# Altium PCB Juricic_Ivan.PcbDoc
Units mm, origin at the board's own origin, x right, y up, seen from the top; angles counter-clockwise.
Board outline 104.25 x 78.25 mm, 2 copper layers (Top Layer, Bottom Layer); 57 components, 71 nets, 285 pads, 6 vias.
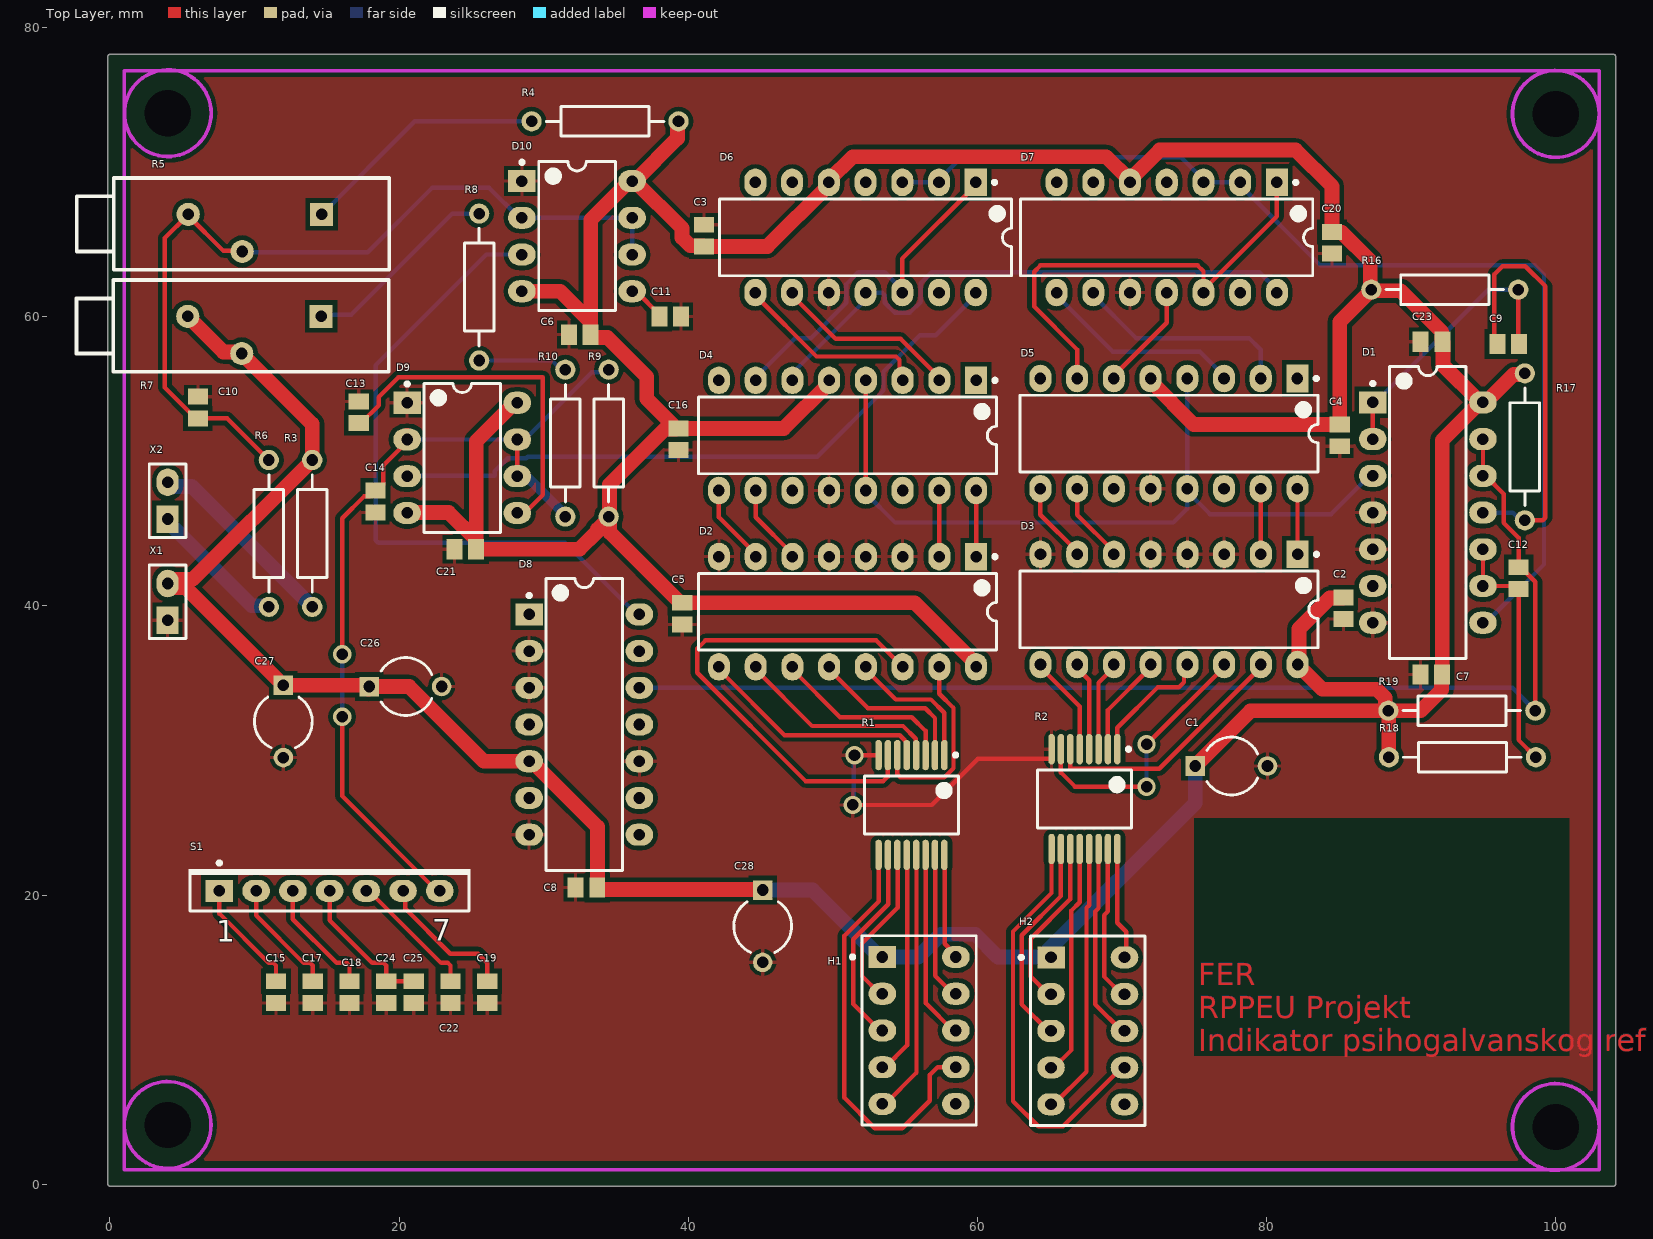
[diagram p0: Top Layer view]
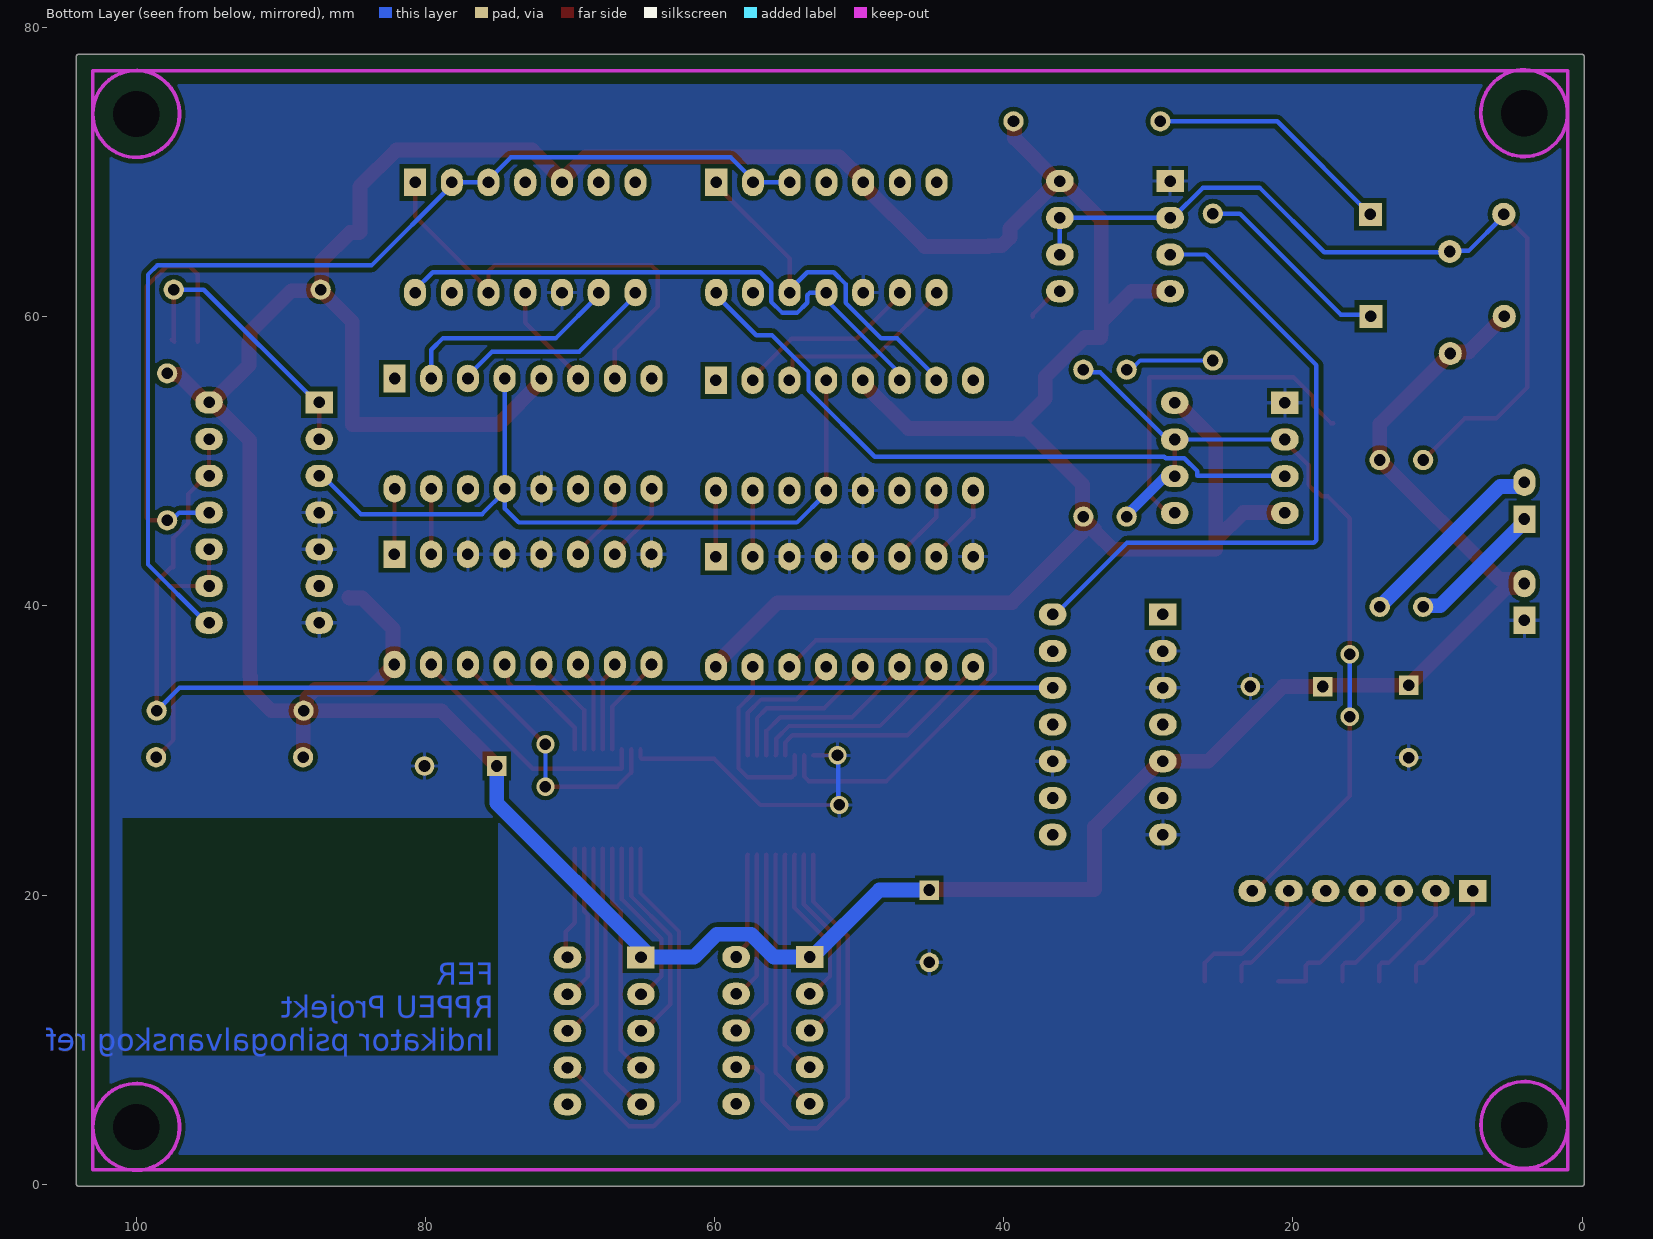
[diagram p1: Bottom Layer view, seen from below]

## Layer stack, top to bottom
Top Solder: solder mask 0.0102, Solder Resist, Dk 3.5
Top Layer: signal copper 0.0356
Dielectric 1: dielectric 0.32, FR-4, Dk 4.8
Bottom Layer: signal copper 0.0356
Bottom Solder: solder mask 0.0102, Solder Resist, Dk 3.5

## Board outline
0,-0.127 cw(c0,0) -0.127,0 -0.127,78 cw(c0,78) 0,78.127 104,78.127 cw(c104,78) 104.127,78 104.127,0 cw(c104,0) 104,-0.127

## Design rules (kind name [scope] priority, off if disabled: settings)
Clearance [All] p1: gap=0.305 ignorepadtopadclearanceinfootprint=TRUE except(0.127: Arc-SMDPad Track-SMDPad)
HoleSize [All] p1: absolutevalues=TRUE maxlimit=3.2 minlimit=0.025 maxpercent=80.000 minpercent=20.000
MinimumSolderMaskSliver [All] p1: minsoldermaskwidth=0.051
PolygonConnect [All] p1: connectstyle=Relief reliefconductorwidth=0.254 reliefentries=4 polygonreliefangle="90 Angle" airgapwidth=0.254
RoutingVias [All] p1: holewidth=0.711 width=1.27 viastyle="Through Hole" minholewidth=0.711 minwidth=1.27 maxholewidth=0.711 maxwidth=1.27
SilkToSolderMaskClearance [IsPad] p1: minsilkscreentomaskgap=0.051 clearancetoexposedcopper=TRUE
SolderMaskExpansion [All] p1: expansion=0.102 istentingtop=FALSE
Width [All] p1: maxlimit=1.524 minlimit=0.305 preferedwidth=0.305
27 further rules are at their usual default settings.

## Classes and differential pairs
component class Juricic_Ulaz: C9 C10 C11 C12 C13 C14 C15 C17 C18 C19 C22 C24 C25 D1 D8 D9 D10 R3 R4 R5 R6 R7 R8 R9 R10 R16 R17 R18 R19 S1 X2
component class Juricic_Napajanje: C1 C2 C3 C4 C5 C6 C7 C8 C16 C20 C21 C23 C26 C27 C28 X1
component class Juricic_Izlaz: D2 D3 D4 D5 D6 D7 H1 H2 R1 R2

## Components (designator, comment, footprint, x,y, rotation, side; value= is the part's Value field where it differs from the comment)
C1 "100u" CAPR5-4X5 77.558,28.921 r0 top
C2 "100n" C0805 85.305,39.831 r90 top
C3 "100n" C0805 41.086,65.597 r270 top
C4 "100n" C0805 85.051,51.781 r90 top
C5 "100n" C0805 39.585,39.462 r90 top
C6 "100n" C0805 32.5,58.75 r0 top
C7 "100n" C0805 91.378,35.244 r0 top
C8 "100n" C0805 32.958,20.512 r0 top
C9 "100n" C0805 96.7,58.104 r0 top
C10 "1u" C0805 6.096,53.709 r270 top
C11 "10n" C0805 38.75,60 r0 top
C12 "100n" C0805 97.423,41.912 r90 top
C13 "1u" C0805 17.221,53.383 r90 top value=100pF
C14 "1u" C0805 18.376,47.209 r90 top value=100pF
C15 "6n8" C0805 11.495,13.285 r90 top
C16 "100n" C0805 39.331,51.515 r90 top
C17 "15n" C0805 14.035,13.285 r90 top
C18 "27n" C0805 16.575,13.285 r90 top
C19 "56n" C0805 26.1,13.285 r90 top
C20 "100n" C0805 84.52,65.101 r90 top
C21 "100n" C0805 24.587,43.907 r0 top
C22 "100n" C0805 23.56,13.285 r90 top
C23 "100n" C0805 91.401,58.258 r0 top
C24 "1u" C0805 19.115,13.285 r90 top
C25 "1u" C0805 21.02,13.285 r90 top
C26 "10u" CAPR5-4X5 20.447,34.417 r0 top
C27 "10u" CAPR5-4X5 12,32 r270 top
C28 "10u" CAPR5-4X5 45.15,17.845 r270 top
D1 "7400" DIP-14 91.147,46.447 r0 top
D2 "74247" DIP-16 51.015,39.589 r270 top
D3 "74247" DIP-16 73.25,39.75 r270 top
D4 "7475" DIP-16 51.015,51.781 r270 top
D5 "7475" DIP-16 73.24,51.908 r270 top
D6 "7490" DIP-14 52.262,65.47 r270 top
D7 "7490" DIP-14 73.09,65.47 r270 top
D8 "7490" DIP-14 32.81,31.79 r0 top
D9 "555" DIP-8 24.373,50.23 r0 top
D10 "555" DIP-8 32.31,65.56 r0 top
H1 "Dpy Amber-CA" A 55.968,10.633 r0 top
H2 "Dpy Amber-CA" A 67.629,10.606 r0 top
R1 "330" SSOP16_N 55.437,26.227 r270 top
R2 "330" SSOP16_N 67.398,26.635 r270 top
R3 "22k" AXIAL-0.4 14,45 r90 top
R4 "330k" AXIAL-0.4 34.25,73.5 r0 top
R5 "1M" Trimmer 10.033,67.056 r180 top
R6 "22k" AXIAL-0.4 11,45 r90 top
R7 "1M" Trimmer 10,60 r180 top
R8 "6k8" AXIAL-0.4 25.541,62.041 r270 top
R9 "470" AXIAL-0.4 34.5,51.25 r270 top value=1K
R10 "390" AXIAL-0.4 31.5,51.25 r270 top
R16 "10k" AXIAL-0.4 92.318,61.863 r180 top
R17 "10k" AXIAL-0.4 97.855,50.992 r90 top
R18 "10k" AXIAL-0.4 93.537,29.529 r180 top
R19 "10k" AXIAL-0.4 93.5,32.75 r180 top value=1K
S1 "SW-6WAY" SW-7 15.201,20.285 r0 top
X1 "Napajanje" HDR1X2 4,39 r90 top
X2 "Ulaz" HDR1X2 4,46 r90 top

## Footprints (in the part's own frame and the unit in brackets; to place one, negate y for a bottom-side part, rotate by r counter-clockwise, add the part's x,y. Pads: shape width x height; smd on the part's side, far side on the other; paste and mask are expansions set on the pad)
A [mm] "LED, 7-Segment Display, 7.62 mm, RHD; 10 Leads; Row Space 5.08 mm; Pitch 2.54 mm"
  rect 1.905x1.524 hole 0.8: 1(-2.54,5.08)
  oval 1.905x1.524 hole 0.8: 2(-2.54,2.54) 3(-2.54,0) 4(-2.54,-2.54) 5(-2.54,-5.08) 6(2.54,-5.08) 7(2.54,-2.54) 8(2.54,0) 9(2.54,2.54) 10(2.54,5.08)
  silkscreen extent -4.72,-6.55 3.95,6.55, body extent -3.95,-6.55 3.95,6.55, height 6.34
AXIAL-0.4 [mm] "Axial Device, Thru-Hole; 2 Leads; 0.4 in Pin Spacing"
  round 1.4 hole 0.8: 1(-5.08,0) 2(5.08,0)
  silkscreen extent -4.06,-1.02 4.06,1.02
C0805 [mm] "Chip Capacitor, Body 2.0x1.3mm, IPC High Density"
  rect 1.1x1.4 smd: 1(-0.75,0) 2(0.75,0)
  body extent -1.1,-0.72 1.1,0.72, height 1.4
CAPR5-4X5 [mm] "Capacitor; 2 Leads"
  rect 1.35x1.35 hole 0.8: 1(-2.5,0)
  round 1.35 hole 0.8: 2(2.5,0)
  silkscreen extent -1.69,-2 1.82,2
DIP-8 [mm] "DIP; 8 Leads; Row Spacing 7.62 mm; Pitch 2.54 mm"
  rect 1.905x1.524 hole 0.8: 1(-3.81,3.81)
  oval 1.905x1.524 hole 0.8: 2(-3.81,1.27) 3(-3.81,-1.27) 4(-3.81,-3.81) 5(3.81,-3.81) 6(3.81,-1.27) 7(3.81,1.27) 8(3.81,3.81)
  silkscreen extent -3.93,-5.15 2.65,5.23, body extent -3.6,-5.15 3.6,5.15, height 5.08
DIP-14 [mm] "DIP; 14 Leads; Row Spacing 7.62 mm; Pitch 2.54 mm"
  rect 1.905x1.524 hole 0.8: 1(-3.81,7.62)
  oval 1.905x1.524 hole 0.8: 2(-3.81,5.08) 3(-3.81,2.54) 4(-3.81,0) 5(-3.81,-2.54) 6(-3.81,-5.08) 7(-3.81,-7.62) 8(3.81,-7.62) 9(3.81,-5.08) 10(3.81,-2.54) 11(3.81,0) 12(3.81,2.54) 13(3.81,5.08) 14(3.81,7.62)
  silkscreen extent -3.93,-10.1 2.65,10.1, body extent -3.6,-10.1 3.6,10.1, height 5.08
DIP-16 [mm] "DIP; 16 Leads; Row Spacing 7.62 mm; Pitch 2.54 mm"
  rect 1.905x1.524 hole 0.8: 1(-3.81,8.89)
  oval 1.905x1.524 hole 0.8: 2(-3.81,6.35) 3(-3.81,3.81) 4(-3.81,1.27) 5(-3.81,-1.27) 6(-3.81,-3.81) 7(-3.81,-6.35) 8(-3.81,-8.89) 9(3.81,-8.89) 10(3.81,-6.35) 11(3.81,-3.81) 12(3.81,-1.27) 13(3.81,1.27) 14(3.81,3.81) 15(3.81,6.35) 16(3.81,8.89)
  silkscreen extent -3.93,-10.3 2.65,10.32, body extent -3.6,-10.28 3.6,10.28, height 5.08
HDR1X2 [mm] "Connector; Header; 2 Position"
  rect 1.905x1.524 hole 0.8: 1(0,0)
  oval 1.905x1.524 hole 0.8: 2(2.54,0)
  silkscreen extent -1.27,-1.27 3.81,1.27
SSOP16_N [mm] "SOP, 16-Leads, Body 6.2x5.3mm, Pitch 0.65mm, IPC Medium Density"
  oval 2.1x0.45 smd: 1(-3.45,2.275) 2(-3.45,1.625) 3(-3.45,0.975) 4(-3.45,0.325) 5(-3.45,-0.325) 6(-3.45,-0.975) 7(-3.45,-1.625) 8(-3.45,-2.275) 9(3.45,-2.275) 10(3.45,-1.625) 11(3.45,-0.975) 12(3.45,-0.325) 13(3.45,0.325) 14(3.45,0.975) 15(3.45,1.625) 16(3.45,2.275)
  silkscreen extent -3.57,-3.25 2,3.25, body extent -2.7,-3.25 2.7,3.25, height 2
SW-7 [mm] "Switch; 7 Leads"
  rect 1.905x1.524 hole 0.8: 1(-7.62,0)
  oval 1.905x1.524 hole 0.8: 2(-5.08,0) 3(-2.54,0) 4(0,0) 5(2.54,0) 6(5.08,0) 7(7.62,0)
  silkscreen extent -9.75,-1.4 9.75,2.05
Trimmer [mm]
  rect 1.6x1.6 hole 0.8: 1(-4.61,-0.015)
  round 1.6 hole 0.8: 2(4.61,-0.015) 3(0.876,2.555)
  silkscreen extent -9.28,-2.52 12.31,3.83

## Part data
C1: library part Elko, "100u capacitor", Cijena=0.299, Dobavljač=Farnell, Kat. broj=1219466
C2 C3 C4 C5 C6 C7 C8 C9 C12 C16 C20 C21 C22 C23: library part Cap, "100n capacitor", LatestRevisionDate=17-Jul-2002, LatestRevisionNote="Re-released for DXP Platform.", PackageDescription="Radial Cap, Thru-Hole; 2 Leads; 0.3 in Pin Spacing", PackageReference=RAD-0.3, Published=8-Jun-2000, Publisher="Altium Limited"
  C2 C3 C4 C5 C6 C7 C8 C16 C20 C21 C23: Cijena=0.0233, Kat. broj=1759122
C10 C13 C14 C24 C25: library part Cap, "1u capacitor", LatestRevisionDate=17-Jul-2002, LatestRevisionNote="Re-released for DXP Platform.", PackageDescription="Radial Cap, Thru-Hole; 2 Leads; 0.3 in Pin Spacing", PackageReference=RAD-0.3, Published=8-Jun-2000, Publisher="Altium Limited"
C11: library part Cap, "10n capacitor", LatestRevisionDate=17-Jul-2002, LatestRevisionNote="Re-released for DXP Platform.", PackageDescription="Radial Cap, Thru-Hole; 2 Leads; 0.3 in Pin Spacing", PackageReference=RAD-0.3, Published=8-Jun-2000, Publisher="Altium Limited"
C15: library part Cap, "6n8 capacitor", LatestRevisionDate=17-Jul-2002, LatestRevisionNote="Re-released for DXP Platform.", PackageDescription="Radial Cap, Thru-Hole; 2 Leads; 0.3 in Pin Spacing", PackageReference=RAD-0.3, Published=8-Jun-2000, Publisher="Altium Limited"
C17: library part Cap, "15n capacitor", LatestRevisionDate=17-Jul-2002, LatestRevisionNote="Re-released for DXP Platform.", PackageDescription="Radial Cap, Thru-Hole; 2 Leads; 0.3 in Pin Spacing", PackageReference=RAD-0.3, Published=8-Jun-2000, Publisher="Altium Limited"
C18: library part Cap, "27n capacitor", LatestRevisionDate=17-Jul-2002, LatestRevisionNote="Re-released for DXP Platform.", PackageDescription="Radial Cap, Thru-Hole; 2 Leads; 0.3 in Pin Spacing", PackageReference=RAD-0.3, Published=8-Jun-2000, Publisher="Altium Limited"
C19: library part Cap, "56n capacitor", LatestRevisionDate=17-Jul-2002, LatestRevisionNote="Re-released for DXP Platform.", PackageDescription="Radial Cap, Thru-Hole; 2 Leads; 0.3 in Pin Spacing", PackageReference=RAD-0.3, Published=8-Jun-2000, Publisher="Altium Limited"
C26 C27 C28: library part Elko, "10u capacitor", Cijena=0.214, Dobavljač=Farnell, Kat. broj=1457413
D1: "NI sklop", Cijena=1.41, Dobavljač=Farnell, Kat. broj=3119930
D2 D3: "Dekoder BCD-a u 7-segmentni sklop", Cijena=1.41, Dobavljač=Farnell, Kat. broj=3119930
D4 D5: "2-bitni CMOS bistabil", Cijena=0.691, Dobavljač=Farnell, Kat. broj=CD74HC75E
D6 D7 D8: "Dekadsko/binarno brojilo", Cijena=1.33, Dobavljač=Farnell, Kat. broj=1470790
H1 H2: "7.62 mm Black Surface Orange 7-Segment Display: CA, RH DP", Colour=Orange, ComponentLink1Description="Manufacturer Link", ComponentLink1URL=http://www.agilent.com/, DatasheetVersion=19-Feb-2002, LatestRevisionDate=17-Dec-2003, LatestRevisionNote="Schematic revised, PCB Footprint replaced.", MinimumIntensity="354 ucd", Note="IF = 5 mA", PackageDescription="LED, 7-Segment Display, 7.62 mm, RHD; 10 Leads; Row Space 5.08 mm; Pitch 2.54 mm", PackageReference=A, PackageVersion=11-Feb-2002, Published=8-Jun-2000, Publisher="Altium Limited"
R1 R2: library part "Res Pack4", "330 ohm, 8 resistor network", Cijena=0.594, Code_IPC=SOP65P780-16, Code_JEDEC=MO-150-AC, Dobavljač=Farnell, Kat. broj=9356665, LatestRevisionDate=29-May-2009, LatestRevisionNote="IPC-7351 Footprint Added.", PackageDescription="16-Pin Plastic Small Outline Package 0.65 mm Pitch", PackageReference=SSOP16, PackageVersion=Oct-2003, Published=24-Mar-1999, Publisher="Altium Limited"
R3 R6: library part Res2, "22k resistor", LatestRevisionDate=17-Jul-2002, LatestRevisionNote="Re-released for DXP Platform.", PackageDescription="Axial Device, Thru-Hole; 2 Leads; 0.4 in Pin Spacing", PackageReference=AXIAL-0.4, Published=8-Jun-2000, Publisher="Altium Limited"
R4: library part Res2, "330k resistor", LatestRevisionDate=17-Jul-2002, LatestRevisionNote="Re-released for DXP Platform.", PackageDescription="Axial Device, Thru-Hole; 2 Leads; 0.4 in Pin Spacing", PackageReference=AXIAL-0.4, Published=8-Jun-2000, Publisher="Altium Limited"
R5 R7: library part Trimmer
R8: library part Res2, "6k8 resistor", LatestRevisionDate=17-Jul-2002, LatestRevisionNote="Re-released for DXP Platform.", PackageDescription="Axial Device, Thru-Hole; 2 Leads; 0.4 in Pin Spacing", PackageReference=AXIAL-0.4, Published=8-Jun-2000, Publisher="Altium Limited"
R9: library part Res2, "470 resistor", LatestRevisionDate=17-Jul-2002, LatestRevisionNote="Re-released for DXP Platform.", PackageDescription="Axial Device, Thru-Hole; 2 Leads; 0.4 in Pin Spacing", PackageReference=AXIAL-0.4, Published=8-Jun-2000, Publisher="Altium Limited"
R10: library part Res2, "390 resistor", LatestRevisionDate=17-Jul-2002, LatestRevisionNote="Re-released for DXP Platform.", PackageDescription="Axial Device, Thru-Hole; 2 Leads; 0.4 in Pin Spacing", PackageReference=AXIAL-0.4, Published=8-Jun-2000, Publisher="Altium Limited"
R16 R17 R18 R19: library part Res2, "10k resistor", LatestRevisionDate=17-Jul-2002, LatestRevisionNote="Re-released for DXP Platform.", PackageDescription="Axial Device, Thru-Hole; 2 Leads; 0.4 in Pin Spacing", PackageReference=AXIAL-0.4, Published=8-Jun-2000, Publisher="Altium Limited"
S1: "6 Way Switch", LatestRevisionDate=17-Jul-2002, LatestRevisionNote="Re-released for DXP Platform.", PackageDescription="Switch; 7 Leads", PackageReference=SW-7, Published=24-Mar-1999, Publisher="Altium Limited"
X1 X2: library part "Header 2", "Header, 2-Pin", Cijena=0.319, Kat. broj=3417645, LatestRevisionDate=17-Jul-2002, LatestRevisionNote="Re-released for DXP Platform.", Publisher="Altium Limited"
D9 D10: Cijena=0.689, Dobavljač=Farnell, Kat. broj=3121211

## Free pads (board coordinates)
  round 3 hole 3.2: 0(4,4.1) 0(4.013,74.066) 0(100,3.962) 0(100,74.016)

## Via types
v1: diameter 1.27, hole 0.8, Top Layer to Bottom Layer, 6 vias

## Nets (pads, with @x,y where several pads share a name; then routed paths per layer and width w, separated by ;. In a path a pad name is that pad's centre, name@x,y a point inside that pad or via, vN(x,y) a via of type N, cw(c..) or ccw(c..) an arc to the next point about the centre after c; other vN are vias at no path point)
D1_8: D1.8 D6.2 D6.3 D7.2 D7.3 | length 74.7
  Bottom Layer w0.305: D6.3 D6.2 57.342,69.471 58.879,71.007 74.093,71.007 75.63,69.471 D7.3 D7.2 78.17,69.09 83.72,63.54 98.541,63.54 99.176,62.905 99.176,42.855 95.148,38.827 D1.8
D9_3: D6.14 D9.3 | length 45.3
  Bottom Layer w0.305: D9.3@20.916,48.987 26.621,48.987 26.621,49.313 27.514,50.206 28.804,50.206 28.905,50.308 48.917,50.308 53.504,54.895 53.504,56.185 56.03,58.711 57.123,58.711 59.882,61.47 D6.14
GND: C1.2 C2.1 C3.1 C4.1 C5.1 C6.1 C7.1 C8.1 C10.1 C11.2 C13.2 C14.1 C15.1 C16.1 C17.1 C18.1 C19.1 C20.1 C21.1 C22.1 C23.1 C24.1 C25.1 C26.2 C27.2 C28.2 D1.4 D1.5 D1.7 D2.3 D2.4 D2.5 D2.8 D3.3 D3.4 D3.5 D3.8 D4.12 D5.12 D6.10 D7.10 D8.2 D8.3 D8.7 D8.10 D9.1 D10.1 R1.8 R2.8 X1.1 | length 20.9
  Top Layer w0.305: v1(51.373,26.227) 56.842,26.227 60.028,29.412 65.056,29.412 65.123,29.479 R2.8 ; v1(51.5,29.656) 53.141,29.656 R1.8
  Bottom Layer w0.305: v1(51.373,26.227) 51.437,26.291 51.437,29.593 v1(51.5,29.656)
NetC9_1: C9.1 D1.11 R17.1 | length 29.6
  Top Layer w0.305: C9.1@95.75,58.25 95.75,62.933 96.306,63.489 97.88,63.489 99.277,62.092 99.277,46.091 99.099,45.912 R17.1
  Bottom Layer w0.305: D1.11 97.024,46.447 97.559,45.912 R17.1
NetC9_2: C9.2 D1.1 D1.2 R16.1 | length 19.5
  Top Layer w0.305: D1.2 D1.1 ; C9.2@97.377,58.25 C9.2@97.525,58.398 ; C9.2@97.398,58.398 R16.1
  Bottom Layer w0.305: D1.1 87.528,54.067 95.324,61.863 R16.1
NetC10_2: C10.2 D10.2 D10.6 D10.7 R5.2 R5.3 R6.2 | length 63.7
  Top Layer w0.305: R5.3@9.124,64.445 9.03,64.538 7.866,64.538 5.39,67.015 3.81,65.435 3.81,55.095 5.946,52.959 C10.2 8.121,52.959 R6.2
  Bottom Layer w0.305: R5.2@5.39,67.015 7.866,64.538 9.03,64.538 9.124,64.445 17.836,64.445 22.287,68.896 26.244,68.896 28.31,66.83 D10.2 D10.7 D10.6
NetC11_1: C11.1 D10.5 | length 2.7
  Top Layer w0.305: D10.5 36.4,61.75 38,60.15 C11.1
NetC12_1: C12.1 D1.9 D1.10 R18.1 | length 17.4
  Top Layer w0.305: D1.10 D1.9 97.713,41.367 C12.1@97.728,41.352 ; C12.1 97.423,30.723 R18.1
NetC12_2: C12.2 D1.12 D1.13 D8.12 R19.1 | length 83.1
  Top Layer w0.305: D1.13 D1.12 95.148,48.987 96.402,47.733 96.402,45.728 97.423,44.707 C12.2 97.573,42.662 98.58,41.655 R19.1
  Bottom Layer w0.305: D8.12 97,34.33 R19.1
NetC13_1: C13.1 D9.5 | length 24.4
  Top Layer w0.305: C13.1 17.371,52.633 18.595,53.856 18.595,54.433 19.957,55.796 29.946,55.796 29.946,47.666 28.727,46.447 D9.5@28.536,46.447
NetC14_2: C14.2 D9.2 D9.6 D9.7 R9.1 R10.2 S1.7 | length 65.7
  Top Layer w0.305: v1(16.067,32.323) 16.067,26.849 22.631,20.285 S1.7 ; v1(16.067,36.641) 16.067,46.047 17.582,47.561 17.978,47.561 C14.2 18.526,47.959 18.924,48.357 18.924,49.725 D9.2@20.358,51.159 ; D9.2@20.104,51.769 20.472,52.137 D9.2@20.662,52.137 ; D9.6 D9.7
  Bottom Layer w0.305: v1(16.067,32.323) v1(16.067,36.641) ; D9.2 D9.7 ; D9.6@28.282,49.597 28.451,49.597 R10.2@31.246,46.801 ; D9.7@28.536,51.527 28.727,51.527 33.343,56.143 34.313,56.143 R9.1 ; D9.6@28.883,48.606 R10.2@31.246,46.243 ; D9.6@28.984,48.707 31.5,46.192 R10.2
NetC15_2: C15.2 S1.1 | length 8.1
  Top Layer w0.305: S1.1 7.581,18.713 10.989,15.305 11.316,15.305 11.495,15.126 C15.2
NetC17_2: C17.2 S1.2 | length 8.1
  Top Layer w0.305: S1.2 10.121,18.586 13.402,15.305 13.856,15.305 14.035,15.126 C17.2
NetC18_2: C18.2 S1.3 | length 8.3
  Top Layer w0.305: S1.3 12.661,18.332 15.688,15.305 16.396,15.305 16.575,15.126 C18.2
NetC19_2: C19.2 S1.6 | length 9.8
  Top Layer w0.305: S1.6 20.425,20.141 20.425,19.066 23.55,15.94 25.465,15.94 26.1,15.305 C19.2
NetC22_2: C22.2 S1.5 | length 9
  Top Layer w0.305: S1.5 17.932,20.285 22.912,15.305 23.381,15.305 23.56,15.126 C22.2
NetC24_2: C24.2 C25.2 S1.4 | length 10.2
  Top Layer w0.305: S1.4 15.201,18.256 18.152,15.305 18.936,15.305 19.115,15.126 C24.2 C25.2
NetD1_3: D1.3 D4.4 D4.13 D5.4 D5.13 | length 54.8
  Top Layer w0.305: D4.13 D4.4
  Bottom Layer w0.305: D4.13 52.285,47.781 54.306,45.76 73.547,45.76 74.51,46.722 D5.13@74.51,47.908 ; D5.4 D5.13 D5.13@74.51,47.908 ; D1.3 87.112,48.987 84.469,46.344 76.074,46.344 D5.13@74.51,47.908
NetD2_1: D2.1 D4.16 | length 4.6
  Top Layer w0.305: D2.1 D4.16
NetD2_2: D2.2 D4.15 | length 4.6
  Top Layer w0.305: D2.2 D4.15
NetD2_6: D2.6 D4.10 | length 5.6
  Top Layer w0.305: D4.10 44.665,46.13 47.205,43.59 D2.6
NetD2_7: D2.7 D4.9 | length 5.6
  Top Layer w0.305: D4.9 42.125,46.13 44.665,43.59 D2.7
NetD2_9: D2.9 R1.5 | length 16.1
  Top Layer w0.305: D2.9 42.125,35.589 46.661,31.053 54.624,31.053 54.966,30.711 54.966,30.687 55.112,30.541 R1.5
NetD2_10: D2.10 R1.4 | length 14.4
  Top Layer w0.305: D2.10 44.665,35.589 48.566,31.688 54.851,31.688 55.734,30.805 55.734,29.705 R1.4
NetD2_11: D2.11 R1.3 | length 12.8
  Top Layer w0.305: D2.11 47.205,35.589 50.496,32.298 55.462,32.298 56.412,31.348 R1.3
NetD2_12: D2.12 R1.2 | length 11.5
  Top Layer w0.305: D2.12 49.745,35.589 52.426,32.907 56.388,32.907 57.062,32.233 R1.2
NetD2_13: D2.13 R1.1 | length 9.8
  Top Layer w0.305: D2.13 52.285,35.589 54.357,33.517 56.783,33.517 57.698,32.602 57.698,29.691 R1.1
NetD2_14: D2.14 R1.7 | length 34.8
  Top Layer w0.305: R1.7 53.784,29.649 53.784,28.182 53.48,27.878 48.111,27.878 40.628,35.361 40.628,37.047 41.188,37.606 52.999,37.606 D2.14
NetD2_15: D2.15 R1.6 | length 13
  Top Layer w0.305: R1.6 54.462,28.345 54.675,28.132 57.705,28.132 58.347,28.774 58.347,32.937 57.365,33.919 D2.15
NetD3_1: D3.1 D5.16 | length 4.5
  Top Layer w0.305: D5.16 82.13,43.57 D3.1
NetD3_2: D3.2 D5.15 | length 4.5
  Top Layer w0.305: D5.15 79.595,48.093 79.595,43.565 D3.2
NetD3_6: D3.6 D5.10 | length 5.6
  Top Layer w0.305: D5.10 66.89,46.301 69.44,43.751 D3.6
NetD3_7: D3.7 D5.9 | length 5.6
  Top Layer w0.305: D5.9 64.35,46.301 66.9,43.751 D3.7
NetD3_9: D3.9 R2.5 | length 7
  Top Layer w0.305: D3.9 64.36,35.75 67.073,33.036 R2.5
NetD3_10: D3.10 R2.4 | length 6.2
  Top Layer w0.305: D3.10 66.9,35.671 67.723,34.848 R2.4
NetD3_11: D3.11 R2.3 | length 6.3
  Top Layer w0.305: R2.3 68.373,34.683 69.44,35.75 D3.11
NetD3_12: D3.12 R2.2 | length 7.1
  Top Layer w0.305: R2.2 69.023,32.793 71.98,35.75 D3.12
NetD3_13: D3.13 R2.1 | length 8.7
  Top Layer w0.305: R2.1 69.673,31.573 72.455,34.355 73.927,34.355 74.287,34.714 74.287,35.707 D3.13
NetD3_14: D3.14 R2.7 | length 18.9
  Top Layer w0.305: R2.7 65.773,28.464 66.74,27.497 v1(71.693,27.497) ; v1(71.693,30.418) 71.711,30.418 77.06,35.767 D3.14 D3.14@76.827,35.707
  Bottom Layer w0.305: v1(71.693,27.497) v1(71.693,30.418)
NetD3_15: D3.15 R2.6 | length 17.6
  Top Layer w0.305: R2.6 66.423,28.726 72.577,28.726 79.6,35.75 D3.15
NetD4_2: D4.2 D6.9 | length 12.9
  Top Layer w0.305: D6.9 47.182,61.47 50.192,58.46 54.687,58.46 57.365,55.782 D4.2
NetD4_3: D4.3 D6.8 | length 13.5
  Top Layer w0.305: D6.8 44.642,61.47 48.871,57.24 54.37,57.24 54.61,57.001 54.61,55.806 D4.3
NetD4_6: D4.6 D6.11 D7.14 | length 40.1
  Bottom Layer w0.305: D4.6 47.205,56.097 52.262,61.154 D6.11 53.404,61.66 53.583,61.481 53.583,60.964 54.297,60.25 55.307,60.25 56.072,61.015 56.072,62.305 56.837,63.07 79.491,63.07 80.71,61.851 D7.14
NetD4_7: D4.7 D6.1 D6.12 | length 24.5
  Top Layer w0.305: D6.12 54.802,64.01 59.882,69.09 D6.1
  Bottom Layer w0.305: D4.7 44.665,55.782 47.373,58.49 48.466,58.49 50.941,60.964 50.941,62.254 51.757,63.07 53.583,63.07 54.802,61.851 D6.12
NetD5_2: D5.2 D7.9 | length 15.3
  Bottom Layer w0.305: D7.9 68.01,61.47 70.969,58.51 78.78,58.51 79.59,57.7 D5.2
NetD5_3: D5.3 D7.8 | length 14.3
  Bottom Layer w0.305: D7.8 65.47,61.47 69.369,57.571 75.388,57.571 77.05,55.909 D5.3
NetD5_6: D5.6 D7.11 | length 7.5
  Top Layer w0.305: D5.6 69.43,55.909 73.09,59.569 D7.11
NetD5_7: D5.7 D7.1 D7.12 | length 31.7
  Top Layer w0.305: D5.7 66.89,57.725 63.921,60.695 63.921,63.108 64.352,63.54 75.224,63.54 75.63,63.133 D7.12@75.63,61.851 ; D7.12 D7.12@75.63,61.851 ; D7.1 80.71,66.931 D7.12@75.63,61.851
NetD8_14: D8.14 D10.3 | length 45.8
  Bottom Layer w0.305: D10.3 26.038,64.29 18.378,56.631 18.378,44.541 18.557,44.363 31.477,44.363 36.43,39.41 D8.14
NetH1_2: H1.2 R1.11 | length 11.3
  Top Layer w0.305: H1.2 53.238,13.173 52.018,14.392 52.018,16.664 54.485,19.131 54.485,22.754 R1.11
NetH1_3: H1.3 R1.10 | length 14.1
  Top Layer w0.305: H1.3 53.238,10.633 51.409,12.462 51.409,16.939 53.835,19.365 53.835,22.754 R1.10
NetH1_4: H1.4 R1.12 | length 15.5
  Top Layer w0.305: H1.4 53.619,8.093 55.135,9.61 55.135,22.754 R1.12
NetH1_5: H1.5 R1.13 | length 18.3
  Top Layer w0.305: H1.5 53.619,5.553 55.785,7.72 55.785,22.754 R1.13
NetH1_7: H1.7 R1.9 | length 29.2
  Top Layer w0.305: R1.9 53.185,22.754 53.185,19.577 50.799,17.191 50.799,5.973 52.897,3.875 54.802,3.875 56.707,5.78 56.707,7.558 57.242,8.093 H1.7
NetH1_8: H1.8 R1.14 | length 13.1
  Top Layer w0.305: R1.14 56.435,22.754 56.435,12.515 58.318,10.633 H1.8
NetH1_9: H1.9 R1.15 | length 10.3
  Top Layer w0.305: R1.15 57.085,22.754 57.085,14.406 58.318,13.173 H1.9
NetH1_10: H1.10 R1.16 | length 7.4
  Top Layer w0.305: R1.16 57.735,22.754 57.735,16.625 58.508,15.852 H1.10
NetH2_2: H2.2 R2.11 | length 11.9
  Top Layer w0.305: H2.2 64.899,13.146 63.679,14.365 63.679,16.974 66.423,19.717 R2.11
NetH2_3: H2.3 R2.10 | length 14.6
  Top Layer w0.305: H2.3 64.899,10.606 63.07,12.435 63.07,17.226 65.773,19.929 R2.10
NetH2_4: H2.4 R2.12 | length 16.1
  Top Layer w0.305: H2.4 65.28,8.066 66.499,9.285 66.499,18.931 67.073,19.505 R2.12
NetH2_5: H2.5 R2.13 | length 18.9
  Top Layer w0.305: H2.5 65.28,5.526 67.54,7.787 67.54,19.11 67.723,19.293 R2.13
NetH2_7: H2.7 R2.9 | length 28.7
  Top Layer w0.305: R2.9 65.123,20.141 62.46,17.479 62.46,5.742 64.2,4.002 65.915,4.002 69.979,8.066 H2.7
NetH2_8: H2.8 R2.14 | length 13.6
  Top Layer w0.305: R2.14 68.373,19.081 68.15,18.858 68.15,12.435 69.979,10.606 H2.8
NetH2_9: H2.9 R2.15 | length 10.8
  Top Layer w0.305: R2.15 69.023,18.869 68.759,18.605 68.759,14.365 69.979,13.146 H2.9
NetH2_10: H2.10 R2.16 | length 7.8
  Top Layer w0.305: R2.16 69.673,18.087 70.296,17.464 70.296,15.813 H2.10
NetR3_1: R3.1 X2.2 | length 13.6
  Bottom Layer w1.016: X2.2 4,48.487 4.235,48.252 5.668,48.252 R3.1
NetR4_1: R4.1 R5.1 | length 25.5
  Bottom Layer w0.305: R5.1@14.61,67.015 21.095,73.5 ; R5.1@15.29,67.695 21.095,73.5 ; R4.1 21.095,73.5
NetR6_1: R6.1 X2.1 | length 9.6
  Bottom Layer w1.016: X2.1 4,45.809 9.816,39.993 10.927,39.993 R6.1
NetR7_1: R7.1 R8.1 | length 13.9
  Bottom Layer w0.305: R7.1 14.734,60.139 16.705,60.139 23.687,67.121 R8.1
NetR8_2: R8.2 R10.1 | length 6.2
  Bottom Layer w0.305: R8.2 30.573,56.961 31.204,56.33 R10.1
VCC: C1.1 C2.2 C3.2 C4.2 C5.2 C6.2 C7.2 C8.2 C16.2 C20.2 C21.2 C23.2 C26.1 C27.1 C28.1 D1.14 D2.16 D3.16 D4.5 D5.5 D6.5 D7.5 D8.5 D9.4 D9.8 D10.4 D10.8 H1.1 H2.1 R3.2 R4.2 R7.2 R7.3 R9.2 R16.2 R17.2 R18.2 R19.2 X1.2 | length 394.4
  Top Layer w1.016: R7.2 7.848,57.557 9.012,57.557 R7.3 14,52.569 R3.2 5.748,41.828 4.235,41.828 4,41.593 X1.2 4,41.487 4.235,41.252 5.248,41.252 C27.1 17.613,34.5 C26.1@17.885,34.228 ; C26.1 20.701,34.417 25.868,29.25 29.191,29.25 33.72,24.72 33.72,20.385 45.11,20.385 C28.1 ; D9.4@20.916,46.447 23.445,46.447 C21.2@25.295,44.597 ; D10.4@28.172,61.75 D10.4 31.149,61.75 33.208,59.691 ; D9.8 27.992,54.04 25.337,51.385 C21.2 32.477,43.907 33.708,45.138 33.708,45.274 34.5,46.066 R9.2 ; C6.2 33.25,66.69 35.93,69.37 D10.8 D10.8@36.311,69.37 ; C6.2@33.292,58.558 34.411,58.558 37.133,55.837 37.133,54.313 C16.2@39.181,52.265 ; R4.2 39.257,73.427 39.257,72.316 D10.8@36.311,69.37 ; D4.5 49.745,55.401 46.61,52.265 C16.2 C16.2@39.181,52.265 ; H1.1@53.238,15.713 H1.1 ; D2.16 59.905,35.97 55.662,40.212 C5.2 39.435,40.212 34.573,45.074 34.573,46.097 R9.2 ; D7.5 D7.5@70.55,69.413 ; D5.5 71.97,55.528 74.966,52.531 C4.2 85.051,59.631 87.238,61.818 R16.2 ; C1.1 78.887,32.75 R19.2 ; C2.2 85.263,40.539 84.364,40.539 82.237,38.413 82.237,36.037 D3.16 82.14,35.887 82.375,35.652 82.428,35.652 83.852,34.228 87.608,34.228 88.203,33.633 88.203,33.071 88.42,32.854 R19.2 ; R18.2 88.438,29.548 88.438,32.732 R19.2 ; R17.2 97.782,55.999 97.079,55.999 95.148,54.067 D1.14 D1.14@94.767,54.067 ; R9.2 34.561,46.231 34.561,48.394 38.39,52.223 39.139,52.223 C16.2@39.181,52.265 ; D10.8@36.311,69.37 39.573,66.107 39.573,65.46 40.145,64.889 41.044,64.889 C3.2 45.48,64.847 49.722,69.09 D6.5 49.722,69.413 51.367,71.058 68.905,71.058 D7.5@70.55,69.413 ; D7.5@70.55,69.413 70.55,69.471 72.595,71.515 82.005,71.515 84.52,69.001 C20.2 84.562,65.809 85.21,65.809 87.164,63.855 87.164,61.937 R16.2 ; R16.2 87.311,61.79 89.267,61.79 92.109,58.948 92.109,58.3 C23.2 92.193,58.216 92.193,56.64 D1.14@94.767,54.067 ; R19.2 90.644,32.75 92.097,34.203 92.097,35.102 92.139,35.144 92.139,51.44 D1.14@94.767,54.067
  Bottom Layer w1.016: C28.1 48.606,20.345 53.238,15.713 H1.1 55.905,15.713 57.479,17.288 59.842,17.288 61.416,15.713 64.414,15.713 75.058,26.358 C1.1
pads on no net: D1.6 D4.1 D4.8 D4.11 D4.14 D5.1 D5.8 D5.11 D5.14 D6.4 D6.6 D6.7 D6.13 D7.4 D7.6 D7.7 D7.13 D8.1 D8.4 D8.6 D8.8 D8.9 D8.11 D8.13 H1.6 H2.6

## Polygon pours and split planes (outlines as drawn)
GND on Bottom Layer "GND_L02_P000" (solid, remove dead copper, pour order 0): 1.295,76.606 1.829,76.073 101.829,76.073 101.829,2.032 1.295,2.032 1.295,2.184 1.168,2.311
GND on Top Layer "GND_L01_P001" (solid, remove dead copper, pour order 1): 1.194,77.038 1.194,76.679 102.54,76.733 102.54,1.168 102.083,1.626 1.041,1.626

## Keep-outs
Keep-Out Layer:
  circle w0.254: c4,4.1 r3
  circle w0.254: c100,3.962 r3
  circle w0.254: c100,74.016 r3
  circle w0.254: c4.013,74.066 r3
  lines w0.254: 1,1 1,77 2,77 103,77 103,1 1,1

## Other copper
Top Layer:
  text "FER / RPPEU Projekt / Indikator psihogalvanskog refleksa" at 75.286,9.195 h1.52
Bottom Layer:
  text "FER / RPPEU Projekt / Indikator psihogalvanskog refleksa" at 75.286,9.22 h1.52

## Silkscreen, mask and mechanical layers (free items; w line width, h text height)
Mechanical 1:
  lines w0.254: 0,0 104,0 104,78 0,78 0,0
Drill Drawing:
  circle w0.254: c1.997,-17.022 r0.847
  lines w0.254: 1.15,-14.059 1.997,-13.636 2.844,-14.059 2.42,-13.212 2.844,-12.366 1.997,-12.789 1.15,-12.366 1.574,-13.212 1.15,-14.059
  lines w0.381: -0.368,-19.012 143.255,-19.012 ; -0.368,-11.392 143.255,-11.392 ; 13.624,-22.822 13.624,-7.582 ; 28.352,-22.822 28.352,-7.582 ; 57.554,-22.822 57.554,-7.582 ; 70.403,-22.822 70.403,-7.582 ; 89.041,-22.822 89.041,-7.582 ; 127.13,-22.822 127.13,-7.582 ; -0.368,-22.822 143.255,-22.822 143.255,-7.582 -0.368,-7.582 -0.368,-22.822
  text "Symbol" at 1.918,-10.249 h1.83
  text "Count" at 14.767,-10.249 h1.83
  text "Hole Size" at 29.495,-10.249 h1.83
  text "Plated" at 58.697,-10.249 h1.83
  text "Hole Type" at 71.546,-10.249 h1.83
  text "Drill Layer Pair" at 90.184,-10.249 h1.83
  text "Via/Pad" at 128.273,-10.249 h1.83
  text "4" at 14.767,-14.059 h1.52
  text "125.98mil (3.200mm)" at 29.495,-14.059 h1.52
  text "PTH" at 58.697,-14.059 h1.52
  text "Round" at 71.546,-14.059 h1.52
  text "Top Layer - Bottom Layer" at 90.184,-14.059 h1.52
  text "Pad" at 128.273,-14.059 h1.52
  text "207" at 14.767,-17.869 h1.52
  text "31.50mil (0.800mm)" at 29.495,-17.869 h1.52
  text "PTH" at 58.697,-17.869 h1.52
  text "Round" at 71.546,-17.869 h1.52
  text "Top Layer - Bottom Layer" at 90.184,-17.869 h1.52
  text "(Mixed)" at 128.273,-17.869 h1.52
  text "211 Total" at 14.767,-21.679 h1.52

## Dimensions
104,78 to 104,0 on Mechanical 2
0,0 to 104,0 on Mechanical 2

## Text inside footprints (layer, text, board x,y; h text height)
S1: Top Overlay "7" at 22.285,16.84 h1.5; Top Overlay "1" at 7.35,16.759 h1.5